# EAGLE board shield lcd1 (1) (EAGLE 7.6.0)
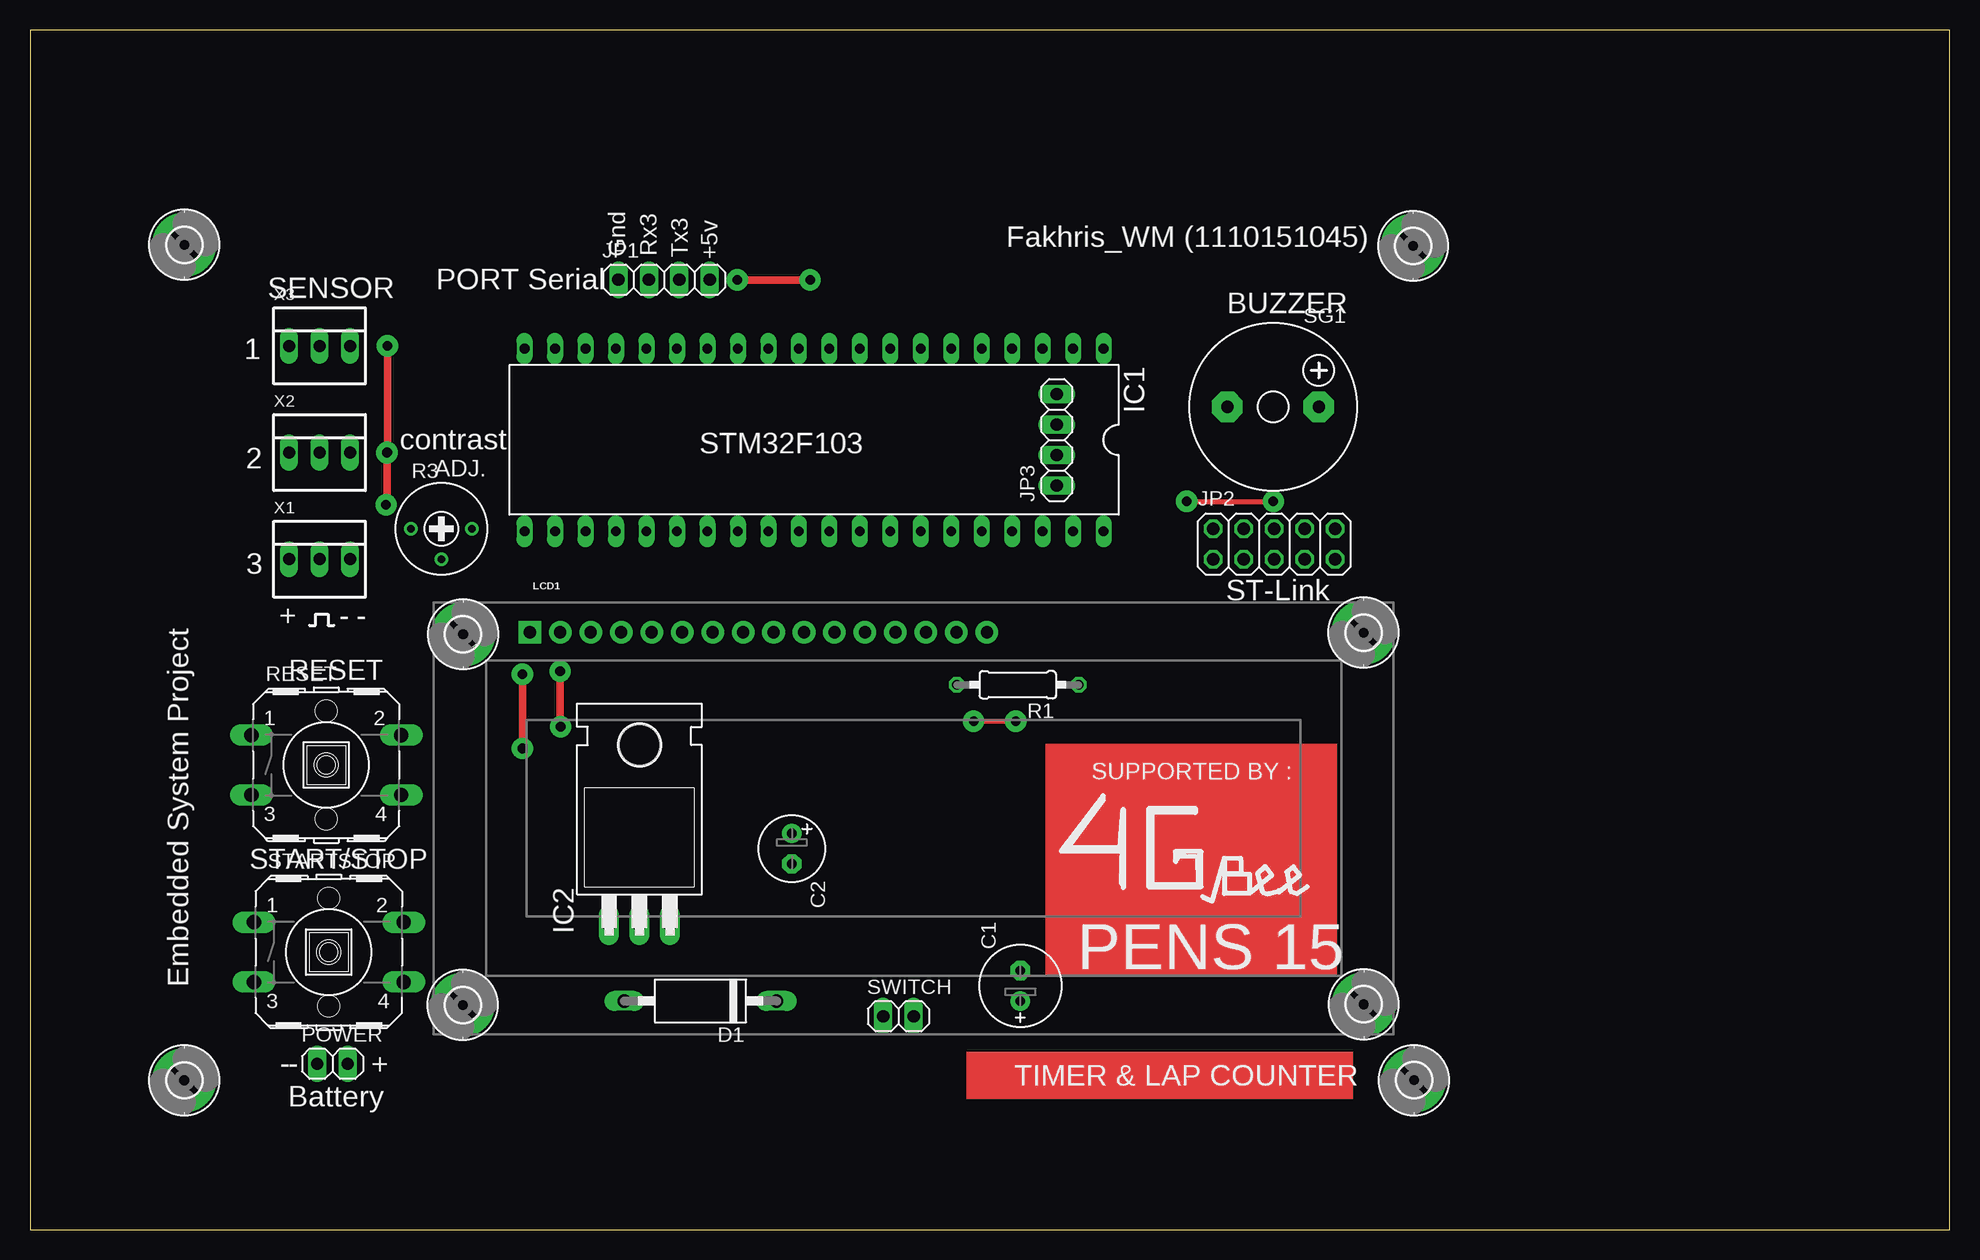
[diagram p0: board, top side]
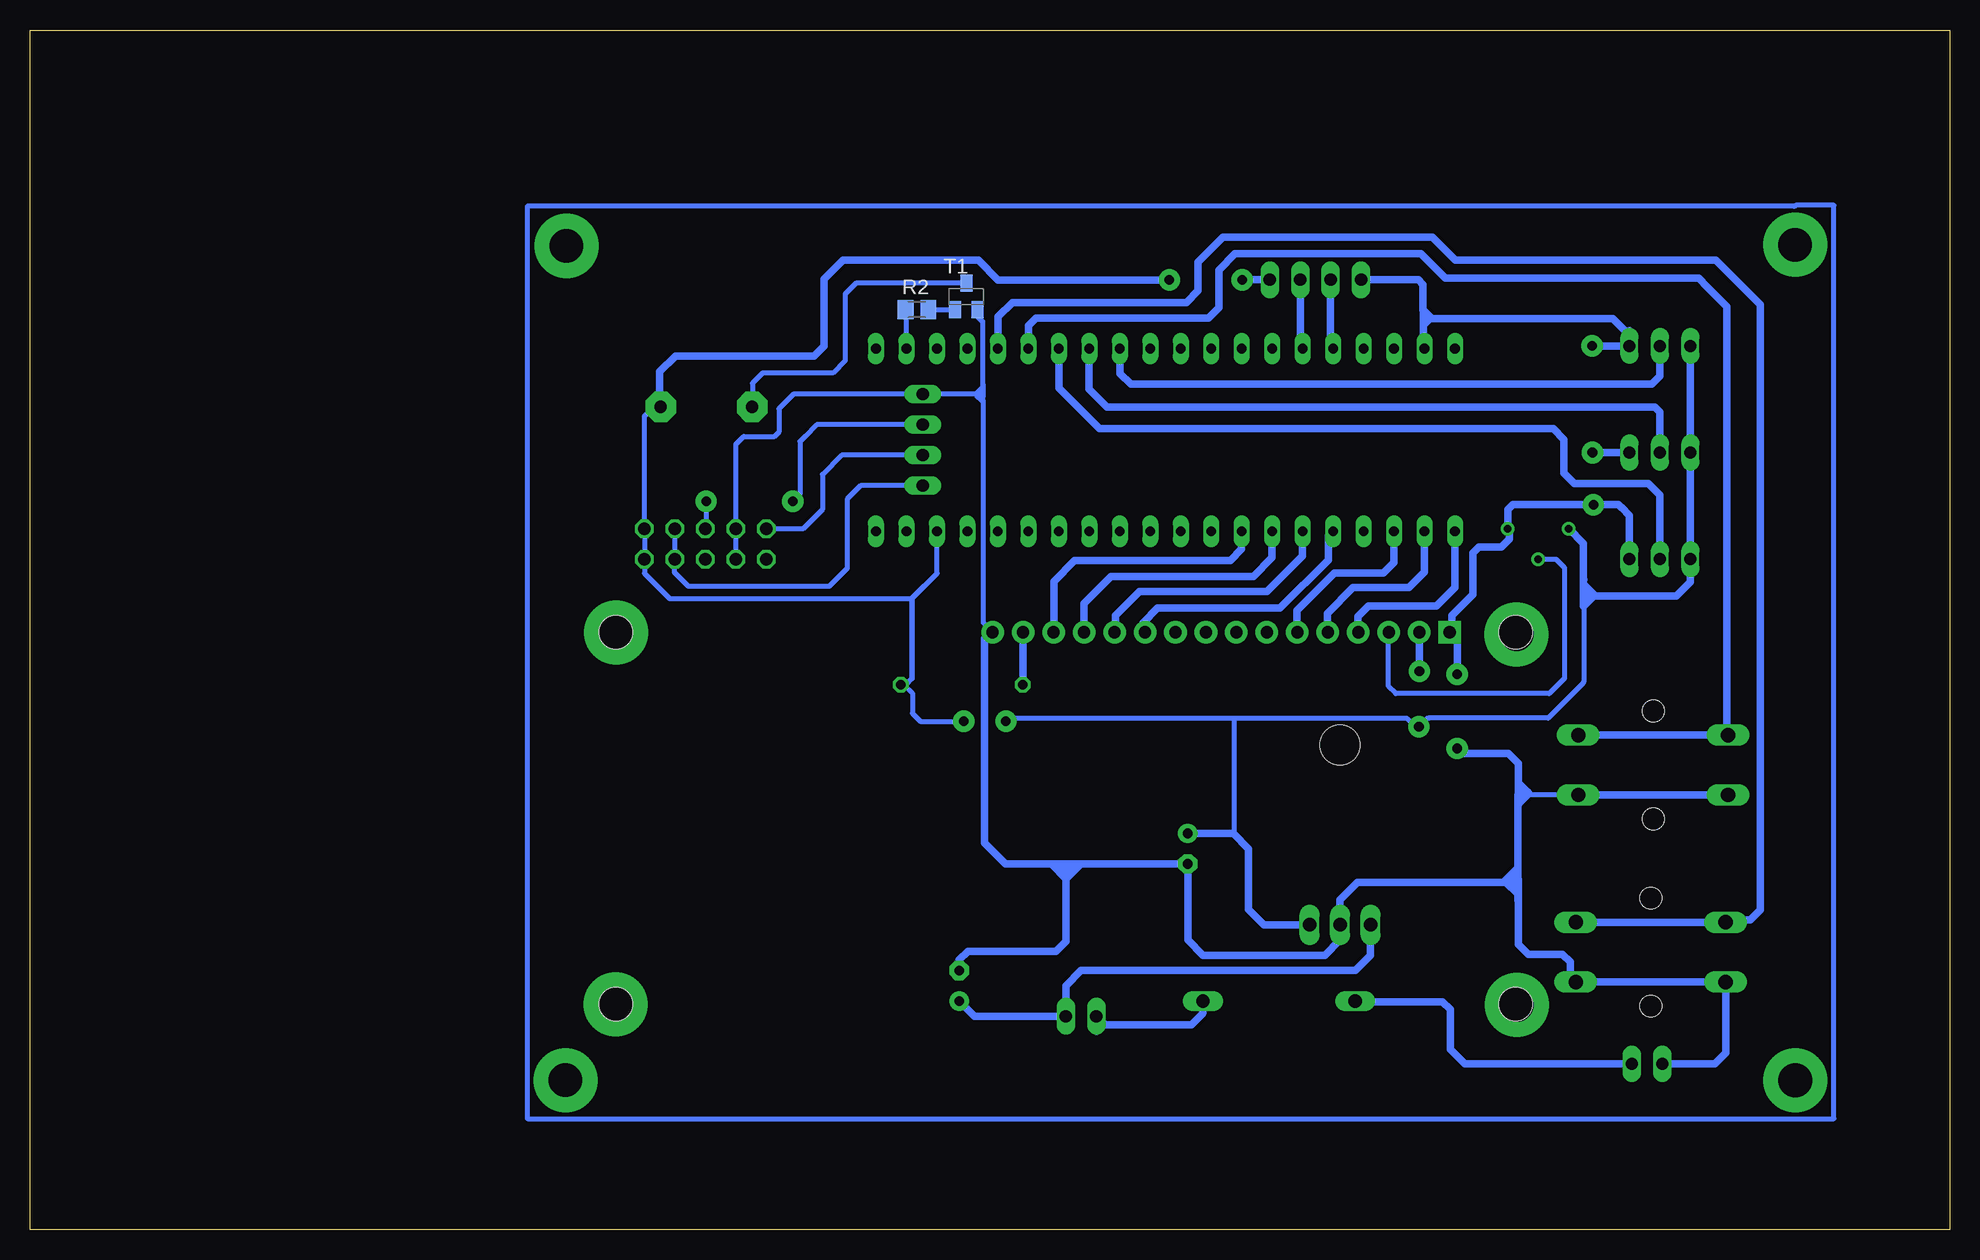
[diagram p1: board, bottom side, seen from below]

Size 160 x 100 mm. Coordinates in mm from the lower left corner, seen from the top.
Outline: 0,0 160,0 160,100 0,100 0,0
Copper layers (1*16): Top 0.035mm / dielectric 1.5mm / Bottom 0.035mm
Design rules "default": minimum track width 10mil, minimum drill 24mil, track to track 8mil, track to pad 8mil, pad to pad 8mil, via to via 8mil, smd to smd 8mil, copper to edge 40mil, drill to drill 8mil, minimum pad ring 10mil, minimum via ring 8mil, stop-mask expansion 4mil, vias tented up to drill 0mil, thermal gap 10mil

## Footprints (pad centres in the part's own frame; a part is rotated, then mirrored left to right if it is on the bottom)
E2,5-7 = drill 0.813 pad 1.6: + -1.27,0 | drill 0.813 pad 1.6 octagon: - 1.27,0
E2,5-6 = drill 0.813 pad 1.6: + -1.27,0 | drill 0.813 pad 1.6 octagon: - 1.27,0
DO15-12 = drill 1.118 long: A 6.35,0; C -6.35,0
2,8-PAD = drill 2.8 pad 5.334: B2,8 0,0
DIL40 = drill 0.813 long: 1 -24.13,-7.62; 2 -21.59,-7.62; 3 -19.05,-7.62; 4 -16.51,-7.62; 5 -13.97,-7.62; 6 -11.43,-7.62; 7 -8.89,-7.62; 8 -6.35,-7.62; 9 -3.81,-7.62; 10 -1.27,-7.62; 11 1.27,-7.62; 12 3.81,-7.62; 13 6.35,-7.62; 14 8.89,-7.62; 15 11.43,-7.62; 16 13.97,-7.62; 17 16.51,-7.62; 18 19.05,-7.62; 19 21.59,-7.62; 20 24.13,-7.62; 21 24.13,7.62; 22 21.59,7.62; 23 19.05,7.62; 24 16.51,7.62; 25 13.97,7.62; 26 11.43,7.62; 27 8.89,7.62; 28 6.35,7.62; 29 3.81,7.62; 30 1.27,7.62; 31 -1.27,7.62; 32 -3.81,7.62; 33 -6.35,7.62; 34 -8.89,7.62; 35 -11.43,7.62; 36 -13.97,7.62; 37 -16.51,7.62; 38 -19.05,7.62; 39 -21.59,7.62; 40 -24.13,7.62
TO220H = drill 1.118 long: 1 -2.54,-10.16; 2 0,-10.16; 3 2.54,-10.16 | hole 3.302: 0,4.826
1X04 = drill 1.016 long: 1 -3.81,0; 2 -1.27,0; 3 1.27,0; 4 3.81,0
2X05 = drill 1.016 octagon: 1 -5.08,-1.27; 2 -5.08,1.27; 3 -2.54,-1.27; 4 -2.54,1.27; 5 0,-1.27; 6 0,1.27; 7 2.54,-1.27; 8 2.54,1.27; 9 5.08,-1.27; 10 5.08,1.27
LCD-16X2_NOSILK = drill 1.016 pad 1.88 square: 1 -32,15.5 | drill 1.016 pad 1.88: 2 -29.46,15.5; 3 -26.92,15.5; 4 -24.38,15.5; 5 -21.84,15.5; 6 -19.3,15.5; 7 -16.76,15.5; 8 -14.22,15.5; 9 -11.68,15.5; 10 -9.14,15.5; 11 -6.6,15.5; 12 -4.06,15.5; 13 -1.52,15.5; 14 1.02,15.5; 15 3.56,15.5; 16 6.1,15.5 | hole 2.8: -37.5,15.5; -37.5,-15.5; 37.5,15.5; 37.5,-15.5
1X02 = drill 1.016 long: 1 -1.27,0; 2 1.27,0
0207/10 = drill 0.813 octagon: 1 -5.08,0; 2 5.08,0
M0805 = smd 1.3 x 1.6: 1 -0.95,0; 2 0.95,0
RTRIM3339P = drill 0.61: 1 -2.54,0; 2 0,-2.54; 3 2.54,0
B3F-40XX = drill 1.194 long: 1 -6.248,2.489; 2 6.248,2.489; 3 -6.248,-2.489; 4 6.248,-2.489 | hole 1.803: 0,-4.496; 0,4.496
F/CM12P = drill 1.016 pad 2.54 octagon: + 3.81,0; - -3.81,0
SOT23-BEC = smd 1 x 1.4: B -0.95,-1.1; C 0,1.1; E 0.95,-1.1
22-23-2031 = drill 1 long: 1 -2.54,0; 2 0,0; 3 2.54,0

## Placement (x,y rotation side)
C1  [E2,5-7]  82.55,20.32 90 top
C2  [E2,5-6]  63.5,31.75 270 top
D1  1N5060GP  [DO15-12]  55.88,19.05 180 top
H1  MOUNT-PAD-ROUND2.8  [2,8-PAD]  111.16,49.76 0 top
H2  MOUNT-PAD-ROUND2.8  [2,8-PAD]  36.1,49.62 0 top
H3  MOUNT-PAD-ROUND2.8  [2,8-PAD]  36.08,18.72 0 top
H4  MOUNT-PAD-ROUND2.8  [2,8-PAD]  111.17,18.78 0 top
H5  MOUNT-PAD-ROUND2.8  [2,8-PAD]  115.36,12.45 0 top
H6  MOUNT-PAD-ROUND2.8  [2,8-PAD]  115.29,82 0 top
H7  MOUNT-PAD-ROUND2.8  [2,8-PAD]  12.87,82.09 0 top
H8  MOUNT-PAD-ROUND2.8  [2,8-PAD]  12.86,12.44 0 top
H9  MOUNT-PAD-ROUND2.8  [2,8-PAD]  3.58,-53.72 0 top  (outside the outline)
H10  MOUNT-PAD-ROUND2.8  [2,8-PAD]  10.74,-53.72 0 top  (outside the outline)
H11  MOUNT-PAD-ROUND2.8  [2,8-PAD]  3.58,-60.88 0 top  (outside the outline)
H12  MOUNT-PAD-ROUND2.8  [2,8-PAD]  10.74,-60.88 0 top  (outside the outline)
IC1  BLUEPILL455  [DIL40]  65.35,65.82 180 top
IC2  7805T  [TO220H]  50.8,35.56 0 top
JP1  [1X04]  52.85,79.18 0 top
JP2  [2X05]  103.71,57.15 0 top
JP3  [1X04]  85.59,65.83 90 top
LCD1  LCD-16X2NOSILK  [LCD-16X2_NOSILK]  73.66,34.29 0 top
POWER  [1X02]  25.21,13.82 0 top
R1  [0207/10]  82.34,45.41 180 top
R2  [M0805]  86.07,76.69 0 bottom
R3  [RTRIM3339P]  34.29,58.42 0 top
RESET  [B3F-40XX]  24.69,38.72 0 top
SG1  F/CM12P  [F/CM12P]  103.62,68.58 0 top
STARTSTOP  [B3F-40XX]  24.9,23.13 0 top
SWITCH  [1X02]  72.39,17.78 0 top
T1  [SOT23-BEC]  81.96,77.78 0 bottom
X1  22-23-2031  [22-23-2031]  24.13,55.88 0 top
X2  22-23-2031  [22-23-2031]  24.13,64.77 0 top
X3  22-23-2031  [22-23-2031]  24.13,73.66 0 top

## Library data of the parts
C1 C2 R1-R3 = resistor
D1 = diode
H1-H12 = holes
IC1 = STM32BluePill; 0: x; MF: BluePill; MPN: BluePill; X: 0
IC2 = linear
JP1-JP3 POWER SWITCH = pinhead
LCD1 = SparkFun-Displays; SF_ID: LCD-00255
RESET STARTSTOP = switch-omron; MF: OMRON COMPONENTS USA; MPN: B3F-4000; OC_FARNELL: 176434; OC_NEWARK: 36K3105
SG1 = buzzer; OC_FARNELL: unknown; OC_NEWARK: unknown
T1 = transistor
X1-X3 = con-molex; MF: MOLEX; MPN: 22-23-2031; OC_FARNELL: 1462950; OC_NEWARK: 30C0862

## Nets
3.3: JP2.7 JP2.8 JP3.1
5: C2.+ IC1.38 IC2.3 JP1.4 JP2.9 JP2.10 LCD1.2 R1.1 R3.1 SG1.+ X1.1 X2.1 X3.1
A0: IC1.5 STARTSTOP.1 STARTSTOP.2
A1: IC1.6 RESET.1 RESET.2
A2: IC1.7 X1.2
A3: IC1.8 X2.2
A4: IC1.9 X3.2
D4: IC1.25 LCD1.11
D5: IC1.26 LCD1.12
D6: IC1.27 LCD1.13
D7: IC1.28 LCD1.14
EN: IC1.23 LCD1.6
GND: C1.- C2.- IC1.19 IC2.2 JP1.1 JP2.3 JP2.4 JP3.4 LCD1.1 LCD1.16 POWER.1 R3.3 RESET.3 RESET.4 STARTSTOP.3 STARTSTOP.4 T1.E X1.3 X2.3 X3.3
N$1: LCD1.15 R1.2
N$2: R2.2 T1.B
N$9: C1.+ IC2.1 SWITCH.2
N$10: SG1.- T1.C
N$12: LCD1.3 R3.2
N$13: D1.C SWITCH.1
N$14: D1.A POWER.2
PA6: IC1.11
PA7: IC1.12
PB3: IC1.31
PB4: IC1.32
PC13: IC1.2 R2.1
R/W: IC1.22 LCD1.5
RS: IC1.21 LCD1.4
RST: JP2.1
RX3: IC1.16 JP1.2
SWCLK: JP2.6 JP3.3
SWIM: JP2.5
SWIO: JP2.2 JP3.2
TX3: IC1.15 JP1.3

## Tracks (layer width: path | path; a pad name or v marks a point on that pad's centre or on a via)
3.3
  Bottom 0.406: JP3.1 90.75,62.02 91.89,60.88 91.89,55.11 93.38,53.62 105.11,53.62 106.28,54.78 106.28,55.85 JP2.7 | 106.29,55.83 JP2.7 | JP2.7 JP2.8
5  (via drill 0.8 pad 1.78)
  Top 0.406: v82.17,42.36 78.66,42.36 v78.65,42.37
  Top 0.61: v44.19,46.54 44.19,42.42 v44.23,41.93 | v58.95,79.17 v65.02,79.17 v65.03,79.16
  Bottom 0.254: 58.42,31.75 58.42,31.8 59.62,33
  Bottom 0.406: SG1.+ 108.01,68.58 108.79,67.8 JP2.10 JP2.9 108.79,54.7 106.68,52.6 86.5,52.6 | 86.5,52.6 84.39,54.71 | 84.39,54.71 84.39,58.19 IC1.38 | R1.1 86.99,45.41 86.47,45.93 86.47,52.57 86.5,52.6 | 84.39,54.71 84.4,54.71 86.47,52.63 86.47,45.96 87.03,45.41 87.39,45.41 87.4,45.41 87.14,45.41 86.44,44.72 86.44,43.04 85.77,42.37 v82.17,42.37 v82.17,42.36 | 29.51,52.8 30.47,51.84 30.47,45.75 arc45 30.57,45.52 33.45,42.63 43.4,42.63 arc-45 43.62,42.54 v44.23,41.93 44.41,41.93 arc45 44.64,42.02 45.2,42.59 59.67,42.59 | 59.67,42.59 78.31,42.59 arc-45 78.53,42.49 v78.65,42.37 | 59.62,33 59.62,42.53 59.67,42.59
  Bottom 0.61: X3.1 X2.1 X1.1 21.59,53.98 22.77,52.8 29.51,52.8 30.52,53.81 30.52,57.19 R3.1 31.57,58.6 | LCD1.2 44.2,46.55 v44.19,46.54 | JP1.4 58.94,79.18 v58.95,79.17 | v65.03,79.16 79.32,79.16 80.95,80.8 92.25,80.8 93.8,79.25 93.8,73.67 94.64,72.82 106.2,72.82 107.52,71.5 107.52,68.67 SG1.+ | IC2.3 57.15,25.4 58.42,26.67 58.42,31.75 59.69,33.02 C2.+
A0
  Bottom 0.61: IC1.5 79.3,73.47 79.3,76.09 78.11,77.28 63.62,77.28 62.65,78.25 62.65,80.63 60.55,82.72 43.11,82.72 41.19,80.8 19.46,80.8 15.78,77.12 15.78,26.64 16.62,25.8 19.17,25.8 STARTSTOP.1 STARTSTOP.2
A1
  Bottom 0.61: 76.87,73.53 IC1.6 | 76.89,73.55 IC1.6 | RESET.2 RESET.1 18.56,41.33 18.56,76.96 20.18,78.58 20.91,79.3 42.01,79.3 44.06,81.35 59.55,81.35 60.9,80 60.9,76.86 61.77,75.99 76.15,75.99 76.78,75.36 IC1.6
A2
  Bottom 0.61: X1.2 24.13,61.22 25.1,62.2 31.27,62.2 32.14,63.07 32.14,65.86 33.04,66.75 70.85,66.75 74.23,70.14 IC1.7
A3
  Bottom 0.61: X2.2 24.14,68.16 24.55,68.58 70.23,68.58 71.72,70.07 71.72,73.43 IC1.8
A4
  Bottom 0.61: X3.2 24.13,71.17 24.82,70.48 68.24,70.48 69.13,71.37 69.13,73.41 IC1.9
D4
  Bottom 0.61: LCD1.11 67.23,49.96 67.23,50.58 66.01,51.79 55.81,51.79 51.79,55.81 51.79,57.8 IC1.25
D5
  Bottom 0.61: IC1.26 53.92,56.16 56.9,53.18 67.53,53.18 69.53,51.19 69.53,49.86 LCD1.12
D6
  Bottom 0.61: IC1.27 56.46,56.01 58.03,54.44 69.88,54.44 72.13,52.19 LCD1.13
D7
  Bottom 0.61: IC1.28 59,56.72 59.94,55.79 72.92,55.79 74.67,54.04 74.67,49.8 LCD1.14
EN
  Bottom 0.61: IC1.23 46.3,55.59 47.17,54.72 51.28,54.72 54.38,51.61 54.38,49.81 LCD1.6
GND  (via drill 0.8 pad 1.78)
  Top 0.61: v29.8,73.67 29.8,64.82 v29.77,64.79 | v29.76,64.75 29.76,60.65 v29.68,60.42 | v41.05,40.1 41.05,46.26 v41.03,46.28
  Bottom 0.406: RESET.4 35.07,36.23 35.07,36.35 | T1.E 81.01,76.12 80.59,75.7 80.59,70.17 81.13,69.63 | 81.13,69.63 JP3.4 96.37,69.64 97.57,68.43 97.54,68.4 97.54,66.53 97.95,66.12 100.51,66.12 101.17,65.47 101.17,60.32 101.17,60.31 JP2.4 JP2.3 | 81.13,69.63 81.13,69.58 80.64,69.09 80.56,69.02 80.56,50.59 LCD1.16
  Bottom 0.61: 26.67,74.93 X3.3 | 73.63,29.24 73.66,29.21 73.66,24.01 74.46,23.21 81.83,23.21 82.57,22.47 82.57,21.61 C1.- | 73.63,29.24 72.39,30.48 C2.- 63.5,24.13 62.23,22.86 52.07,22.86 50.8,24.13 IC2.2 50.8,27.48 49.34,28.95 37.18,28.95 | LCD1.1 | X3.3 26.67,74.55 28.08,75.95 43.3,75.95 43.84,75.41 | 43.84,73.51 IC1.19 43.84,73.51 43.84,75.41 | X1.3 26.67,59.51 27.33,60.17 27.34,60.17 27.59,60.42 v29.68,60.42 36.4,60.42 36.8,60.02 36.8,58.45 R3.3 36.7,58.29 36.7,57.55 37.35,56.9 39.21,56.9 39.74,56.38 39.74,52.93 41.49,51.17 41.49,49.95 LCD1.1 | LCD1.1 41.76,49.69 41.67,49.69 41.03,49.05 v41.03,46.28 | 37.18,28.95 35.99,30.13 35.99,35.43 35.07,36.35 35.93,37.22 35.93,38.87 36.77,39.7 40.62,39.7 40.63,39.68 v41.05,40.1 | 37.18,28.95 36.96,28.95 35.95,27.93 35.95,23.76 35.12,22.93 32.26,22.93 31.62,22.3 31.62,21.11 STARTSTOP.4 | 31.72,20.78 STARTSTOP.4 | 23.88,13.88 POWER.1 19.58,13.83 18.66,14.75 18.66,20.1 | RESET.3 RESET.4 | STARTSTOP.3 18.66,20.1 | STARTSTOP.4 19.2,20.64 18.66,20.1 | LCD1.16 79.93,49.79 80.44,49.28 80.44,32.23 79.17,30.96 78.69,30.48 74.87,30.48 73.63,29.24 | X3.3 29.78,73.66 v29.8,73.67 | v29.77,64.79 26.69,64.79 X2.3 29.74,64.77 v29.76,64.75 | 43.84,75.41 43.84,75.42 43.31,75.95 43.31,76.09 43.89,76.67 43.89,78.79 44.27,79.17 JP1.1
N$1
  Bottom 0.61: LCD1.15 77.22,45.45 R1.2
N$2
  Bottom 0.406: R2.2 T1.B
N$3
  Bottom 0.61: 35.98,30.61 arc90 35.98,30.61 35.98,27.44 arc-90 35.95,27.47 35.95,29.19 36.28,29.19 arc-90 36.32,29.15 36.32,28.97
N$4
  Bottom 0.61: 35.16,36.46 35.66,36.46 arc-90 35.97,36.14 35.97,35.39 arc-90 35.94,35.42 35.94,37.2
N$5
  Bottom 0.61: 71.82,30.47 75.11,30.47 arc90 75.13,30.5 74.02,30.5 arc90 73.71,30.18 73.71,29.64 arc90 74.01,29.95 74.01,30.05 73.52,30.05 arc-90 73.44,30.13
N$6
  Bottom 0.61: 30.49,54.17 arc-90 30.5,54.16 30.5,51.97
N$7
  Bottom 0.61: 29.7,52.76 30,52.76 arc90 30.26,53.02 arc-90 30.32,52.97 30.32,52.53
N$8
  Bottom 0.406: 118.53,9.25 9.64,9.25 9.64,85.38 12.82,85.38 12.85,85.32
N$9
  Bottom 0.61: C1.+ 81.28,17.78 SWITCH.2 73.66,20.32 72.39,21.59 49.53,21.59 48.26,22.86 IC2.1
N$10
  Bottom 0.406: T1.C 91.15,78.88 92.04,77.99 92.04,72.45 93.08,71.41 98.93,71.41 99.79,70.55 99.79,68.6 SG1.-
N$12
  Bottom 0.406: R3.2 34.27,55.86 32.78,55.86 32.09,55.17 32.09,45.95 33.36,44.67 46.15,44.67 46.75,45.28 46.75,49.76 arc45 LCD1.3
  Bottom 0.61: 34.17,56 R3.2
N$13
  Bottom 0.61: 71.12,16.51 SWITCH.1 70.51,17.17 arc-45 70.29,17.08 63.17,17.08 62.32,17.93 arc-45 62.23,18.15 D1.C
N$14
  Bottom 0.61: POWER.2 40.39,13.81 41.6,15.03 41.6,18.34 42.26,19 49.48,19 D1.A
N$15
  Bottom 0.406: 80.57,70.42 80.56,70.42 80.56,69.48 | 80.56,69.09 80.56,69.48 | 80.56,69.48 80.7,69.62
N$16
  Bottom 0.406: 43.86,75.34 43.86,76.63 43.95,76.72 43.95,76.66 43.98,76.63
N$17
  Bottom 0.406: 43.9,76.76 43.9,76.69 43.97,76.61 43.97,75.48 43.92,75.42
N$18
  Bottom 0.406: 12.97,85.3 118.56,85.3 118.56,9.38
PC13
  Bottom 0.406: IC1.2 86.94,76.61 R2.1
R/W
  Bottom 0.61: IC1.22 43.76,54.82 45.08,53.5 49.73,53.5 51.87,51.36 51.87,49.84 LCD1.5
RS
  Bottom 0.61: IC1.21 41.22,53.54 42.79,51.97 48.42,51.97 49.29,51.09 49.29,49.8 LCD1.4
RX3
  Bottom 0.61: JP1.2 51.58,73.64 IC1.16
SWCLK  (via drill 0.8 pad 1.78)
  Top 0.406: v96.42,60.7 103.5,60.7 v103.64,60.71
  Bottom 0.406: JP3.3 94.43,67.09 95.41,66.11 | v103.64,60.71 103.64,58.48 JP2.6 | 95.41,66.11 | 95.41,66.11 95.83,65.69 95.83,61.29 v96.42,60.7
SWIO
  Bottom 0.406: JP3.2 92.35,64.56 93.95,62.95 93.95,60.02 95.58,58.4 98.6,58.4 JP2.2
TX3
  Bottom 0.61: JP1.3 54.12,73.64 IC1.15
(copper drawn outside any net)
  shapes: Top area x2

## Text on the board
tPlace: Fakhris_WM (1110151045) | Gnd | Rx3 | Tx3 | +5v | SENSOR | PORT Serial | BUZZER | 1 | contrast | STM32F103 | 2 | ADJ. | 3 | ST-Link | + - | - | RESET | SUPPORTED BY : | START/STOP | PENS 15 | Embedded System Project | - | - | + | TIMER & LAP COUNTER | Battery